# EAGLE board Finalized Eagle Board Junior Design (EAGLE 9.6.2)
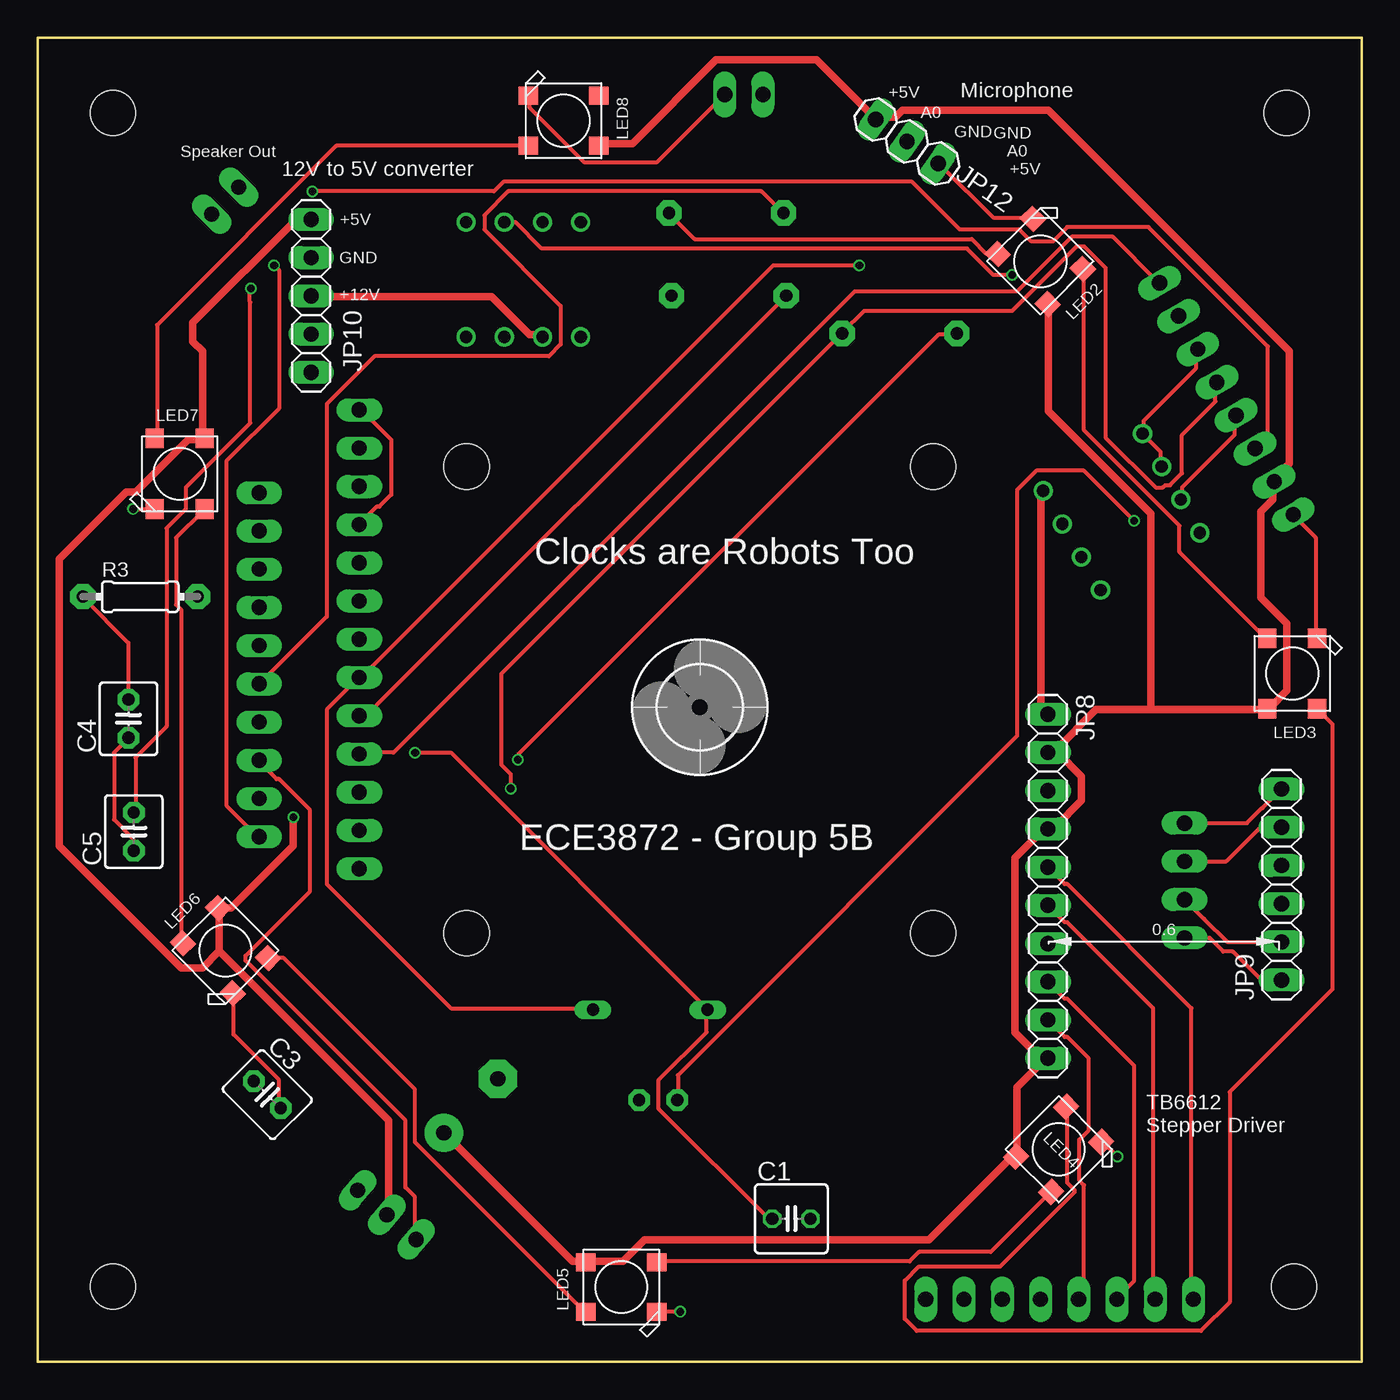
[diagram p0: board, top side]
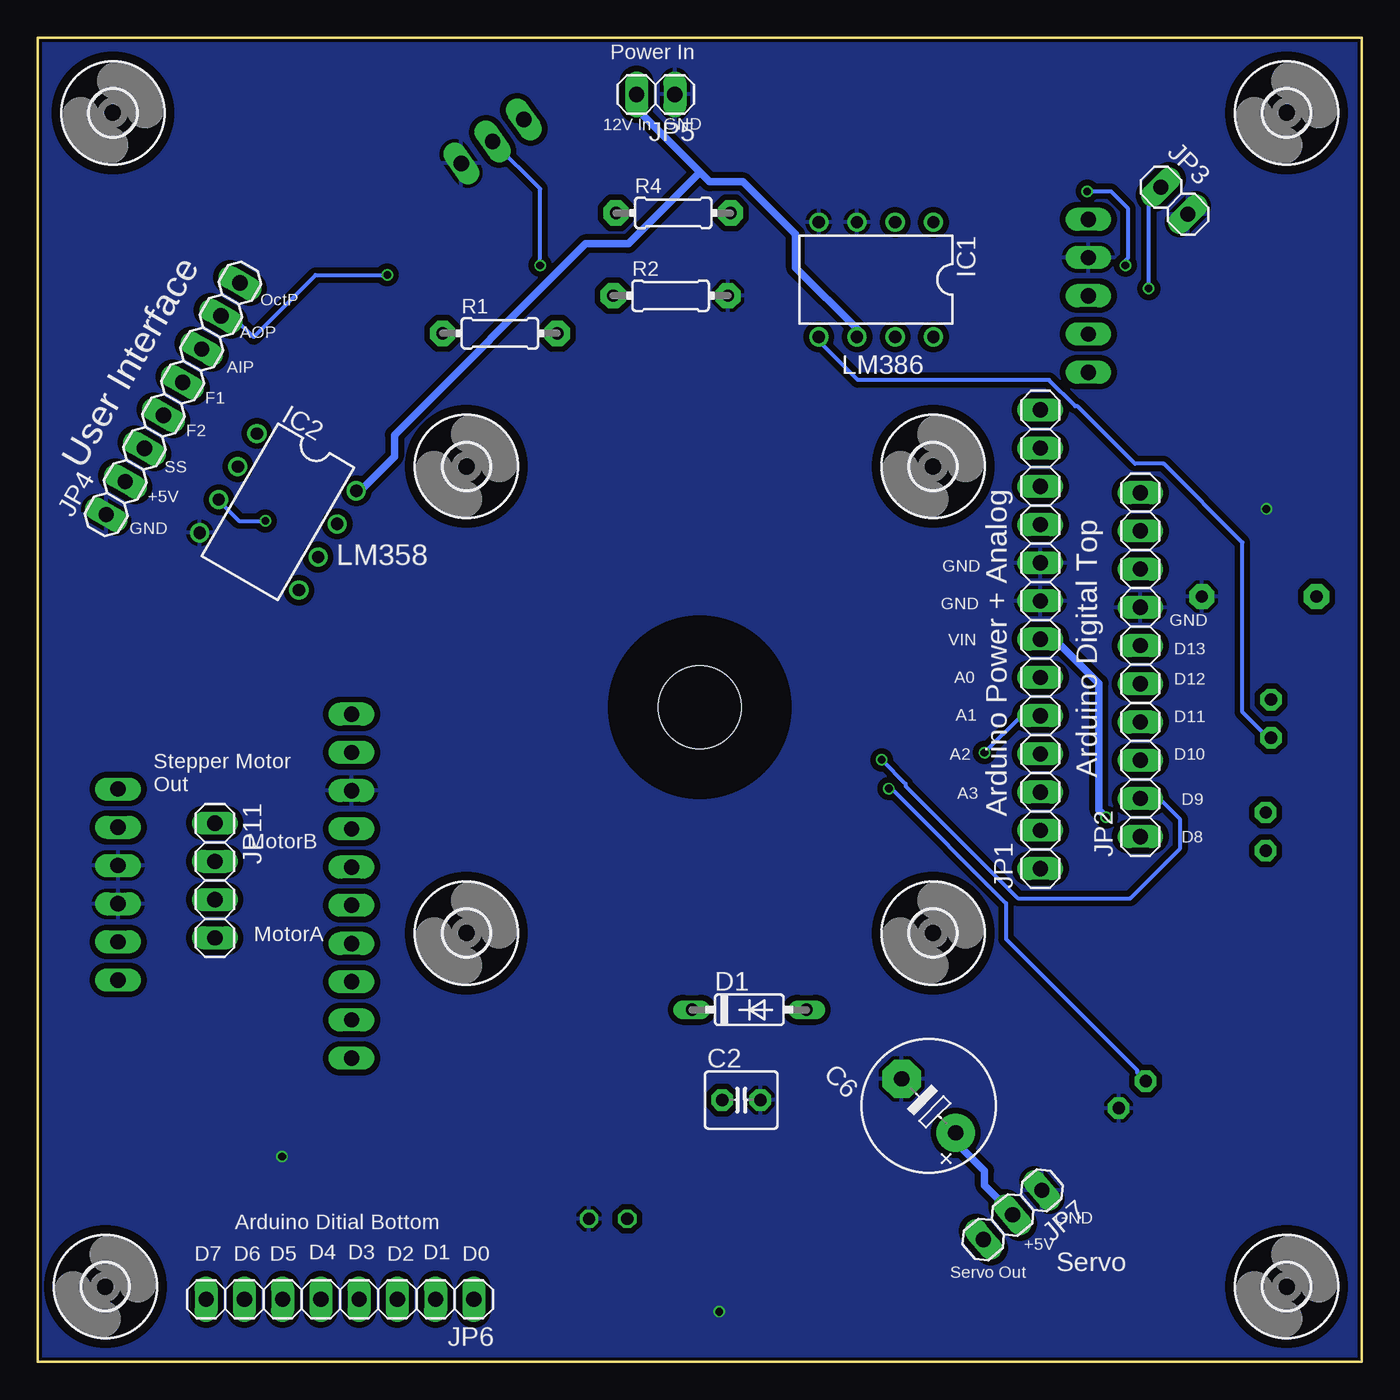
[diagram p1: board, bottom side, seen from below]

Size 88 x 88 mm. Coordinates in mm from the lower left corner, seen from the top.
Outline: 0,0 0,88 88,88 88,0 0,0
Copper layers (1*16): Top 0.035559375mm / dielectric 1.6mm / Bottom 0.035559375mm
Design rules "jlcpcb2layer": minimum track width 5mil, minimum drill 12mil, track to track 5mil, track to pad 5mil, pad to pad 5mil, via to via 5mil, smd to smd 5mil, copper to edge 8mil, drill to drill 6mil, minimum pad ring 5mil, minimum via ring 3mil, stop-mask expansion 2.5mil, vias tented up to drill 0mil, thermal gap 10mil
Net classes: 0 default: width 0.254 mm, drill 0.508 mm, clearance 0.381 mm; 1 power: width 0.508 mm, drill 0.508 mm, clearance 0.381 mm

## Footprints (pad centres in the part's own frame; a part is rotated, then mirrored left to right if it is on the bottom)
C025-050X050 = drill 0.813 octagon: 1 -1.27,0; 2 1.27,0
C025-040X050 = drill 0.813 pad 1.422 octagon: 1 -1.27,0; 2 1.27,0
E5-8,5 = drill 1.016 pad 2.54: + -2.54,0 | drill 1.016 pad 2.54 octagon: - 2.54,0
DO35-7 = drill 0.813 long: A 3.81,0; C -3.81,0
DIL08 = drill 0.813 pad 1.27: 1 -3.81,-3.81; 2 -1.27,-3.81; 3 1.27,-3.81; 4 3.81,-3.81; 5 3.81,3.81; 6 1.27,3.81; 7 -1.27,3.81; 8 -3.81,3.81
1X13 = drill 1.016 long: 1 -15.24,0; 2 -12.7,0; 3 -10.16,0; 4 -7.62,0; 5 -5.08,0; 6 -2.54,0; 7 0,0; 8 2.54,0; 9 5.08,0; 10 7.62,0; 11 10.16,0; 12 12.7,0; 13 15.24,0
1X10 = drill 1.016 long: 1 -11.43,0; 2 -8.89,0; 3 -6.35,0; 4 -3.81,0; 5 -1.27,0; 6 1.27,0; 7 3.81,0; 8 6.35,0; 9 8.89,0; 10 11.43,0
1X02 = drill 1.016 long: 1 -1.27,0; 2 1.27,0
1X08 = drill 1.016 long: 1 -8.89,0; 2 -6.35,0; 3 -3.81,0; 4 -1.27,0; 5 1.27,0; 6 3.81,0; 7 6.35,0; 8 8.89,0
1X03 = drill 1.016 long: 1 -2.54,0; 2 0,0; 3 2.54,0
1X06 = drill 1.016 long: 1 -6.35,0; 2 -3.81,0; 3 -1.27,0; 4 1.27,0; 5 3.81,0; 6 6.35,0
1X05 = drill 1.016 long: 1 -5.08,0; 2 -2.54,0; 3 0,0; 4 2.54,0; 5 5.08,0
1X04 = drill 1.016 long: 1 -3.81,0; 2 -1.27,0; 3 1.27,0; 4 3.81,0
WS2812B-NARROW = smd 1.3 x 1.2: 1-VDD 2.35,-1.65; 2-DOUT 2.35,1.65; 3-GND -2.35,1.65; 4-DIN -2.35,-1.65
0204/7 = drill 0.813 pad 1.676 octagon: 1 -3.81,0; 2 3.81,0
5,5 = hole 5.5: 0,0
3,0 = hole 3: 0,0

## Placement (x,y rotation side)
C1  1uF  [C025-050X050]  50.09,9.51 0 top
C2  1uF  [C025-040X050]  41.24,17.4 0 bottom
C3  100nF  [C025-040X050]  15.26,17.76 315 top
C4  .05uF  [C025-040X050]  6.04,42.74 90 top
C5  250uF  [C025-040X050]  6.39,35.24 90 top
C6  1000uF  [E5-8,5]  28.79,17.01 135 bottom
D1  1N4148DO35-7  [DO35-7]  40.71,23.4 0 bottom
IC1  LM386N-1  [DIL08]  32.28,71.92 180 bottom
IC2  LM358N  [DIL08]  72.03,56.49 240 bottom
JP1  [1X13]  21.37,48.02 90 bottom
JP2  [1X10]  14.72,46.33 90 bottom
JP3  [1X02]  12.46,77.17 315 bottom
JP4  [1X08]  79,64 60 bottom
JP5  [1X02]  46.93,84.23 180 bottom
JP6  [1X08]  67.91,4.16 180 bottom
JP7  [1X03]  23.21,9.77 220 bottom
JP8  [1X10]  67.14,31.61 270 top
JP9  [1X06]  82.65,31.72 90 top
JP10  [1X05]  18.17,70.84 270 top
JP11  [1X04]  76.22,31.99 270 bottom
JP12  [1X03]  57.77,81.1 145 top
LED2  WS2812B_5050N  [WS2812B-NARROW]  66.63,73.13 315 top
LED3  WS2812B_5050N  [WS2812B-NARROW]  83.37,45.74 270 top
LED4  WS2812B_5050N  [WS2812B-NARROW]  67.85,14.13 225 top
LED5  WS2812B_5050N  [WS2812B-NARROW]  38.78,4.98 180 top
LED6  WS2812B_5050N  [WS2812B-NARROW]  12.48,27.33 135 top
LED7  WS2812B_5050N  [WS2812B-NARROW]  9.44,59.02 90 top
LED8  WS2812B_5050N  [WS2812B-NARROW]  34.95,82.48 0 top
R1  100  [0204/7]  57.28,68.35 0 bottom
R2  1k  [0204/7]  45.94,70.85 0 bottom
R3  10  [0204/7]  6.82,50.85 0 top
R4  470  [0204/7]  45.76,76.35 0 bottom
U$1  [5,5]  44,43.5 0 top
U$2  [3,0]  28.5,28.5 0 bottom
U$3  [3,0]  28.5,59.5 0 bottom
U$4  [3,0]  59.5,59.5 0 bottom
U$5  [3,0]  59.5,28.5 0 bottom
U$6  [3,0]  5,83 180 bottom
U$7  [3,0]  83,83 180 bottom
U$8  [3,0]  5,5 180 bottom
U$9  [3,0]  83.5,5 180 bottom

## Library data of the parts
C1-C6 LED2-LED8 R1-R4 = adafruit
D1 = diode
IC1 IC2 = linear
JP1-JP12 = pinhead
U$1-U$9 = holes

## Nets
5V: JP1.10 JP1.13
+3.3V: JP1.11
+5V [power]: C6.+ JP1.7 JP4.2 JP7.2 JP8.2 JP8.4 JP8.10 JP10.1 JP12.3 LED2.1-VDD LED3.1-VDD LED4.1-VDD LED5.1-VDD LED6.1-VDD LED7.1-VDD LED8.1-VDD
+12V [power]: IC1.6 IC2.8 JP5.2 JP8.1 JP10.3
A0: D1.A JP1.6 JP12.2
A1: C1.1 D1.C JP1.5 R2.1
A2: JP1.4 JP4.8
A3: JP1.3
A4: JP1.2
A5: JP1.1
AREF: JP2.8
AUDIO_IN_POT: IC2.1 IC2.2 JP4.6
AUDIO_OUT_POT: IC1.2 JP4.7
D0: JP6.1
D1: JP6.2
D2: JP6.3
D3: JP6.4
D4: JP6.5 JP8.9
D5: JP6.6 JP8.8
D6: JP6.7 JP8.6
D7: JP6.8 JP8.5
D8: JP2.1 JP4.3
D9: JP2.2 R1.1
D10: JP2.3 JP7.3
D11: JP2.4
D12: JP2.5 R4.1
D13: JP2.6
F1: C3.1 JP4.5 R1.2
F2: C2.1 IC2.3 JP4.4
GND: C1.2 C2.2 C3.2 C6.- IC1.3 IC1.4 IC2.4 JP1.8 JP1.9 JP2.7 JP3.2 JP4.1 JP5.1 JP7.1 JP8.3 JP9.3 JP9.4 JP10.2 JP12.1 LED2.3-GND LED3.3-GND LED4.3-GND LED5.3-GND LED6.3-GND LED7.3-GND LED8.3-GND R2.2 R3.2
N$1: C4.2 R3.1
N$3: LED2.4-DIN R4.2
N$4: C4.1 C5.1 IC1.5
N$5: C5.2 JP3.1
N$6: LED2.2-DOUT LED3.4-DIN
N$7: LED4.2-DOUT LED5.4-DIN
N$8: LED5.2-DOUT LED6.4-DIN
N$9: LED6.2-DOUT LED7.4-DIN
N$10: LED7.2-DOUT LED8.4-DIN
N$11: LED3.2-DOUT LED4.4-DIN
N$17: JP8.7
N$21: JP9.6 JP11.1
N$22: JP9.5 JP11.2
N$25: JP9.2 JP11.3
N$26: JP9.1 JP11.4
RES: JP1.12
SCL: JP2.10
SDA: JP2.9

## Tracks (layer width: path | path; a pad name or v marks a point on that pad's centre or on a via)
5V
  Top 0.254: JP1.10 21.43,55.72 22.54,56.83 22.7,56.83 23.5,57.63 23.5,61.28 21.43,63.34 JP1.13
+5V  (via drill 0.51)
  Top 0.508: JP10.1 18.1,75.88 17.14,75.88 10.32,69.06 10.32,67.79 10.95,67.15 10.95,61.44 LED7.1-VDD 10.79,61.28 10,61.28 6.51,57.78 5.87,57.78 1.43,53.34 1.43,34.29 9.53,26.19 10.95,26.19 12.06,27.3 | C6.+ 27.15,15.08 35.56,6.67 36.35,6.67 LED5.1-VDD 36.67,6.67 38.89,6.67 40.32,8.1 59.21,8.1 64.77,13.65 LED4.1-VDD 65.09,13.65 65.09,18.26 66.99,20.16 JP8.10 66.67,20.16 64.93,21.91 64.93,33.5 66.99,35.56 JP8.4 67.15,35.56 67.63,35.56 69.37,37.31 69.37,38.89 67.79,40.48 JP8.2 67.15,40.64 67.63,40.64 70.33,43.34 73.98,43.34 | 12.06,27.3 12.06,30 LED6.1-VDD 12.22,30.16 12.86,30.16 16.99,34.29 v16.99,36.2 | 12.06,27.3 23.34,16.03 23.34,9.84 JP7.2 | LED8.1-VDD 37.31,80.96 39.53,80.96 45.09,86.52 51.75,86.52 55.56,82.71 JP12.3 55.88,82.71 56.99,82.71 57.47,83.19 67.15,83.19 83.19,67.15 83.19,59.69 82.23,58.74 JP4.2 82.07,58.42 82.07,57.31 81.28,56.52 81.28,50.8 83.03,49.05 83.03,44.61 81.92,43.5 LED3.1-VDD 81.6,43.34 73.98,43.34 | 73.98,43.34 73.98,56.36 67.15,63.18 67.15,70.17 LED2.1-VDD
  Bottom 0.508: v16.99,36.2 17.46,36.67 17.46,45.09 20.32,47.94 21.27,47.94 JP1.7 | C6.+ 26.99,15.08 26.99,14.61 25.08,12.7 25.08,11.75 23.18,9.84 JP7.2
+12V
  Top 0.508: IC2.8 66.67,57.78 66.67,43.5 66.99,43.18 JP8.1 | IC1.6 33.5,68.26 32.7,68.26 30.16,70.8 18.26,70.8 JP10.3
  Bottom 0.508: 43.97,79.06 43.34,78.42 41.12,78.42 37.62,74.93 37.62,72.71 33.5,68.58 33.5,68.26 IC1.6 | 43.97,79.06 48.1,83.19 48.1,84.14 JP5.2 | 43.97,79.06 48.74,74.3 51.59,74.3 64.29,61.59 64.29,60.17 66.52,57.94 66.67,57.94 IC2.8
A0  (via drill 0.51)
  Top 0.254: D1.A 36.83,23.5 27.46,23.5 19.21,31.75 19.21,43.34 21.27,45.4 JP1.6 21.43,45.4 48.9,72.87 v54.61,72.87
  Bottom 0.254: v54.61,72.87 54.61,77.95 57.63,80.96 JP12.2
A1  (via drill 0.51)
  Top 0.254: C1.1 48.74,9.37 41.27,16.83 41.27,18.73 44.45,21.91 44.45,23.34 D1.C 44.45,23.5 27.46,40.48 v25.08,40.48 | JP1.5 21.43,43.02 21.91,43.02 49.69,70.8 R2.1
  Bottom 0.254: v25.08,40.48 22.7,42.86 21.43,42.86 JP1.5
A2
  Top 0.254: JP1.4 21.43,40.48 23.65,40.48 54.29,71.12 65.09,71.12 68.74,74.77 71.44,74.77 74.45,71.75 JP4.8
AUDIO_IN_POT
  Top 0.254: IC2.2 74.61,59.53 74.61,60.48 73.5,61.59 IC2.1 73.5,61.75 73.5,62.55 76.99,66.04 76.99,67.15 JP4.6
AUDIO_OUT_POT  (via drill 0.51)
  Top 0.254: v64.77,72.23 63.5,72.23 61.75,73.98 33.5,73.98 31.75,75.72 31.11,75.72 IC1.2
  Bottom 0.254: v64.77,72.23 69.53,72.23 73.66,68.1 74.93,69.37 75.72,69.37 JP4.7
D4
  Top 0.254: JP8.9 67.15,22.7 68.26,21.59 68.42,21.59 69.85,20.16 69.85,15.4 69.22,14.76 69.22,12.06 69.53,11.75 69.53,4.6 69.22,4.29 JP6.5
D5
  Top 0.254: JP8.8 67.15,25.24 68.26,24.13 68.42,24.13 72.87,19.68 72.87,5.4 71.75,4.29 JP6.6
D6
  Top 0.254: JP8.6 67.15,30.32 68.26,29.21 68.42,29.21 74.14,23.5 74.14,4.29 JP6.7
D7
  Top 0.254: JP8.5 67.15,32.86 68.26,31.75 68.42,31.75 76.68,23.5 76.68,4.29 JP6.8
D8  (via drill 0.51)
  Top 0.254: v15.72,72.87 16.03,72.55 16.03,63.34 12.54,59.85 12.54,36.99 14.61,34.92 JP2.1 | v18.26,77.79 30.32,77.79 30.96,78.42 58.1,78.42 61.28,75.25 65.25,75.25 66.04,74.45 67.47,74.45 68.42,75.41 73.82,75.41 81.76,67.47 81.76,61.59 80.96,60.8 JP4.3
  Bottom 0.254: v15.72,72.87 15.72,73.18 15.56,73.34 15.56,76.68 16.67,77.79 v18.26,77.79
D9  (via drill 0.51)
  Top 0.254: v31.91,40.01 31.91,40.32 59.85,68.26 60.96,68.26 R1.1
  Bottom 0.254: v31.91,40.01 30.32,38.42 30.32,38.26 22.86,30.8 15.4,30.8 12.06,34.13 12.06,36.04 13.34,37.31 14.61,37.31 JP2.2
D10
  Top 0.254: JP2.3 14.76,39.85 15.88,38.73 16.03,38.73 18.1,36.67 18.1,31.27 13.81,26.99 13.81,26.67 24.45,16.03 24.45,11.59 25.08,10.95 25.08,8.26 JP7.3
D12
  Top 0.254: JP2.5 14.76,45.09 19.21,49.53 19.21,63.66 22.38,66.83 33.97,66.83 34.77,67.63 34.77,70.17 29.69,75.25 29.69,76.2 31.27,77.79 48.1,77.79 49.53,76.36 R4.1
F1  (via drill 0.51)
  Top 0.254: v31.43,38.1 31.43,39.05 30.8,39.69 30.8,45.72 53.34,68.26 R1.2 53.5,68.42 54.93,69.85 64.77,69.85 69.06,74.14 69.53,74.14 70.96,72.71 70.96,61.44 74.3,58.1 74.77,58.1 74.93,58.26 75.25,58.26 76.04,59.05 76.04,61.59 78.26,63.82 78.26,65.09 JP4.5
  Bottom 0.254: v31.43,38.1 31.27,38.1 23.65,30.48 23.65,28.1 14.92,19.37 14.92,19.21 14.45,18.73 C3.1
F2  (via drill 0.51)
  Top 0.254: IC2.3 76.04,57.31 76.04,58.1 79.53,61.59 79.53,62.87 JP4.4 | v72.87,55.88 69.53,59.21 66.36,59.21 65.09,57.94 65.09,41.59 42.55,19.05 42.55,17.46 C2.1
  Bottom 0.254: v72.87,55.88 74.61,55.88 75.88,57.15 IC2.3
GND  (via drill 0.51)
  Top 0.254: v42.7,3.33 41.27,3.33 LED5.3-GND | v71.75,13.65 70.8,14.61 LED4.3-GND | LED6.3-GND 13.02,24.45 13.02,21.75 16.03,18.73 16.03,16.99 C3.2 | v6.35,56.67 LED7.3-GND | LED8.3-GND 32.7,83.98 32.7,83.34 36.35,79.69 41.12,79.69 45.56,84.14 JP5.1 | LED3.3-GND 84.93,48.1 84.93,54.77 83.5,56.2 JP4.1 | LED2.3-GND 66.04,76.04 63.5,76.04 60.01,79.53 JP12.1
  pour Bottom: -8.89,97.79 -8.89,-8.89 97.79,-8.89 97.79,0 97.79,97.79
N$1
  Top 0.254: C4.2 6.03,44.13 6.03,47.78 3.02,50.8 R3.1
N$3
  Top 0.254: LED2.4-DIN 63.66,73.66 63.02,73.66 62.07,74.61 43.66,74.61 42.07,76.2 R4.2
N$4
  Top 0.254: C5.1 6.35,33.97 6.35,34.77 5.08,36.04 5.08,40.48 6.03,41.43 C4.1
  Bottom 0.254: IC1.5 36.04,68.1 36.04,67.79 33.5,65.25 20.8,65.25 19.05,63.5 18.89,63.5 15.08,59.69 13.18,59.69 7.94,54.45 7.94,43.18 6.19,41.43 C4.1
N$5  (via drill 0.51)
  Top 0.254: C5.2 6.51,36.51 6.51,40.16 8.57,42.23 8.57,55.4 9.84,56.67 9.84,58.1 14.13,62.39 14.13,70.42 14.1,70.45 14.1,71.27 v14.16,71.33
  Bottom 0.254: v14.16,71.33 14.16,77.26 JP3.1
N$6
  Top 0.254: LED2.2-DOUT 69.53,72.55 69.53,61.91 75.88,55.56 75.88,53.82 81.6,48.1 LED3.4-DIN
N$7
  Top 0.254: LED5.4-DIN 41.27,6.67 57.94,6.67 58.58,7.3 63.34,7.3 67.31,11.27 LED4.2-DOUT
N$8
  Top 0.254: LED6.4-DIN 15.4,26.83 16.35,26.83 25.08,18.1 25.08,14.61 36.35,3.33 LED5.2-DOUT
N$9
  Top 0.254: LED6.2-DOUT 9.53,27.94 9.53,50.01 9.21,50.32 9.21,54.77 10.95,56.52 LED7.4-DIN
N$10
  Top 0.254: LED7.2-DOUT 7.94,61.44 7.94,68.9 19.84,80.8 32.54,80.8 LED8.4-DIN
N$11
  Top 0.254: LED4.4-DIN 68.42,16.83 68.42,11.91 68.9,11.43 68.9,11.27 63.98,6.35 58.58,6.35 57.63,5.4 57.63,2.86 58.42,2.06 77.31,2.06 79.22,3.97 79.22,17.94 86.04,24.77 86.04,42.39 85.09,43.34 LED3.2-DOUT
N$21
  Top 0.254: JP9.6 81.38,36.8 81.37,36.8 80.37,35.8 JP11.1
N$22
  Top 0.254: JP11.2 78.98,33.26 81.28,35.56 81.31,35.53 JP9.5
N$25
  Top 0.254: JP11.3 77.49,29.45 77.51,29.45 79.05,27.91 JP9.2
N$26
  Top 0.254: JP11.4 77.88,28.18 78.79,27.27 79.41,27.27 81.31,25.37 JP9.1

## Text on the board
tPlace: +5V | Microphone | A0 | GND | GND | Speaker Out | A0 | 12V to 5V converter | +5V | +5V | GND | +12V | Clocks are Robots Too | ECE3872 - Group 5B | TB6612 / Stepper Driver
bPlace: Power In | GND | 12V In | User Interface | OctP | AOP | LM386 | AIP | F1 | F2 | SS | Arduino Power + Analog | +5V | Arduino Digital Top | GND | LM358 | GND | GND | GND | VIN | D13 | D12 | A0 | A1 | D11 | D10 | A2 | Stepper Motor / Out | D9 | A3 | D8 | MotorB | MotorA | GND | Arduino Ditial Bottom | +5V | D0 | D1 | D2 | D3 | D4 | D5 | D6 | D7 | Servo | Servo Out